# Altium PCB PCB_dustshield_final_2026-06-11.pcbdoc
Units mil, origin at the board's own origin, x right, y up, seen from the top; angles counter-clockwise.
Board outline 5255 x 3565 mil, 2 copper layers (Top Layer, Bottom Layer); 23 components, 38 nets, 114 pads, 6 vias.
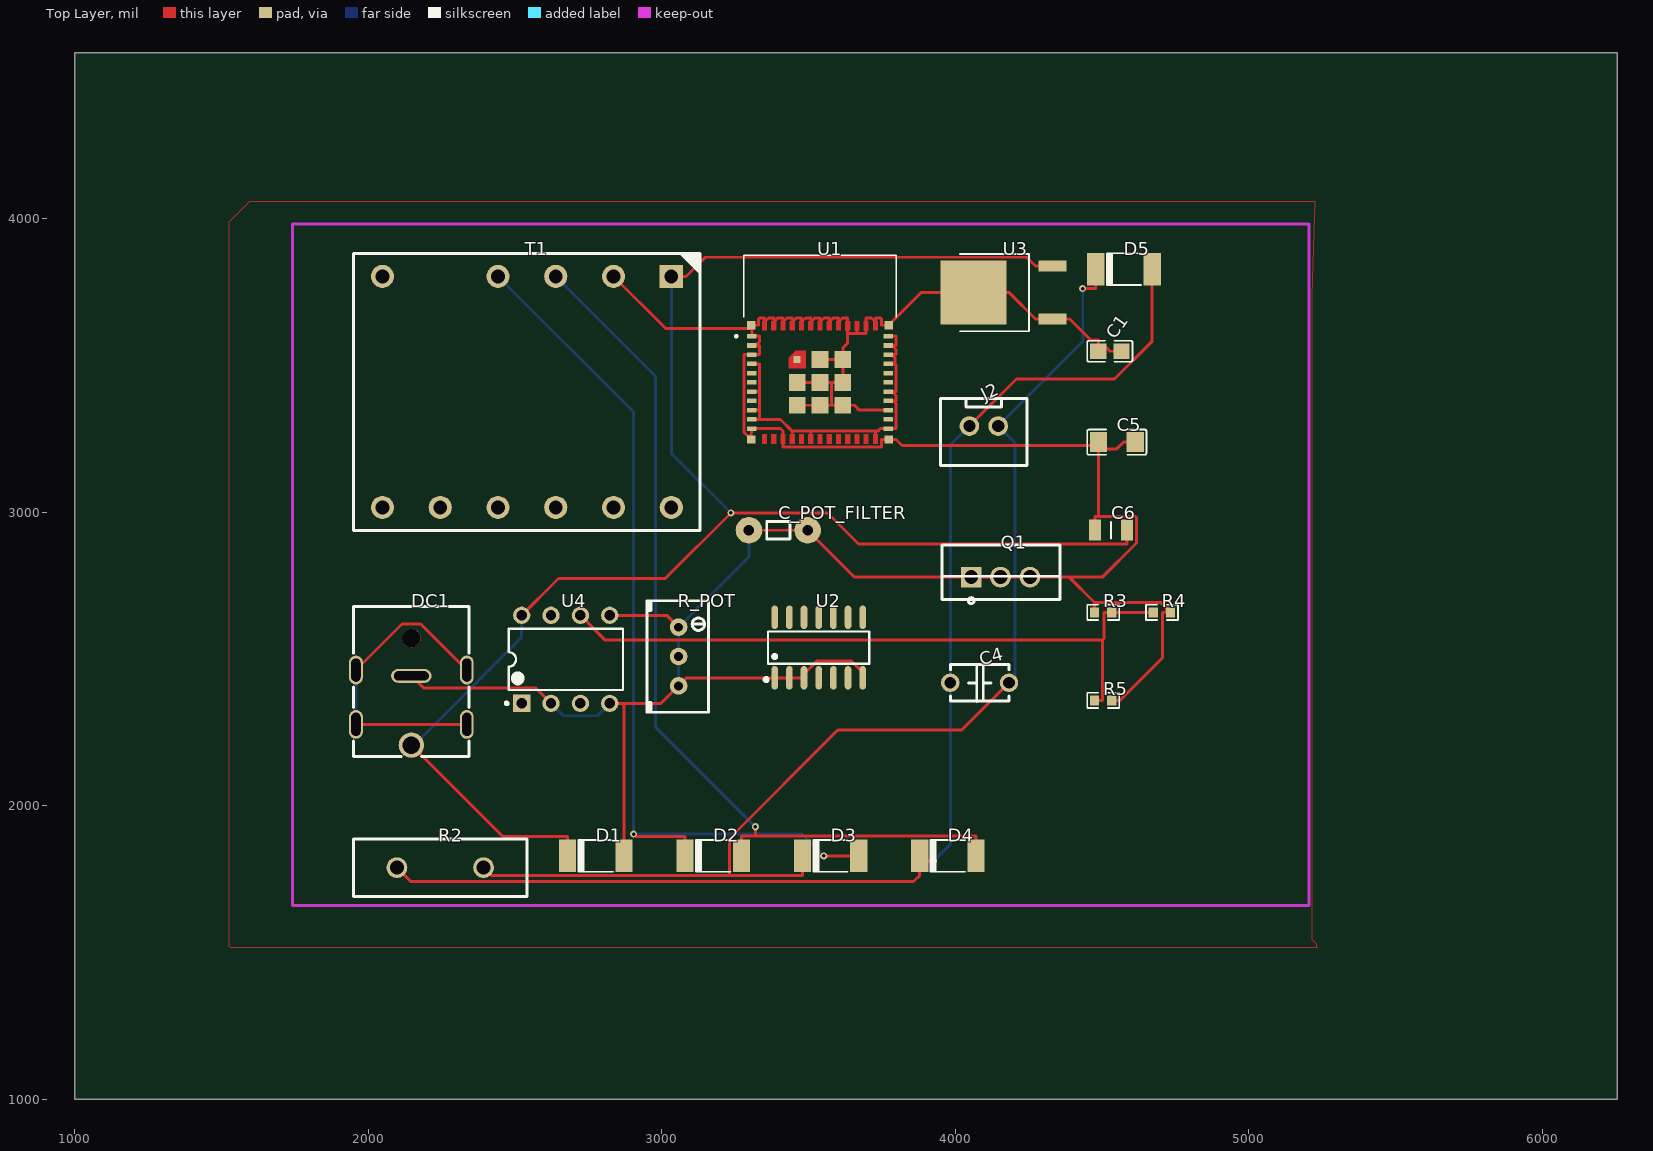
[diagram p0: Top Layer view]
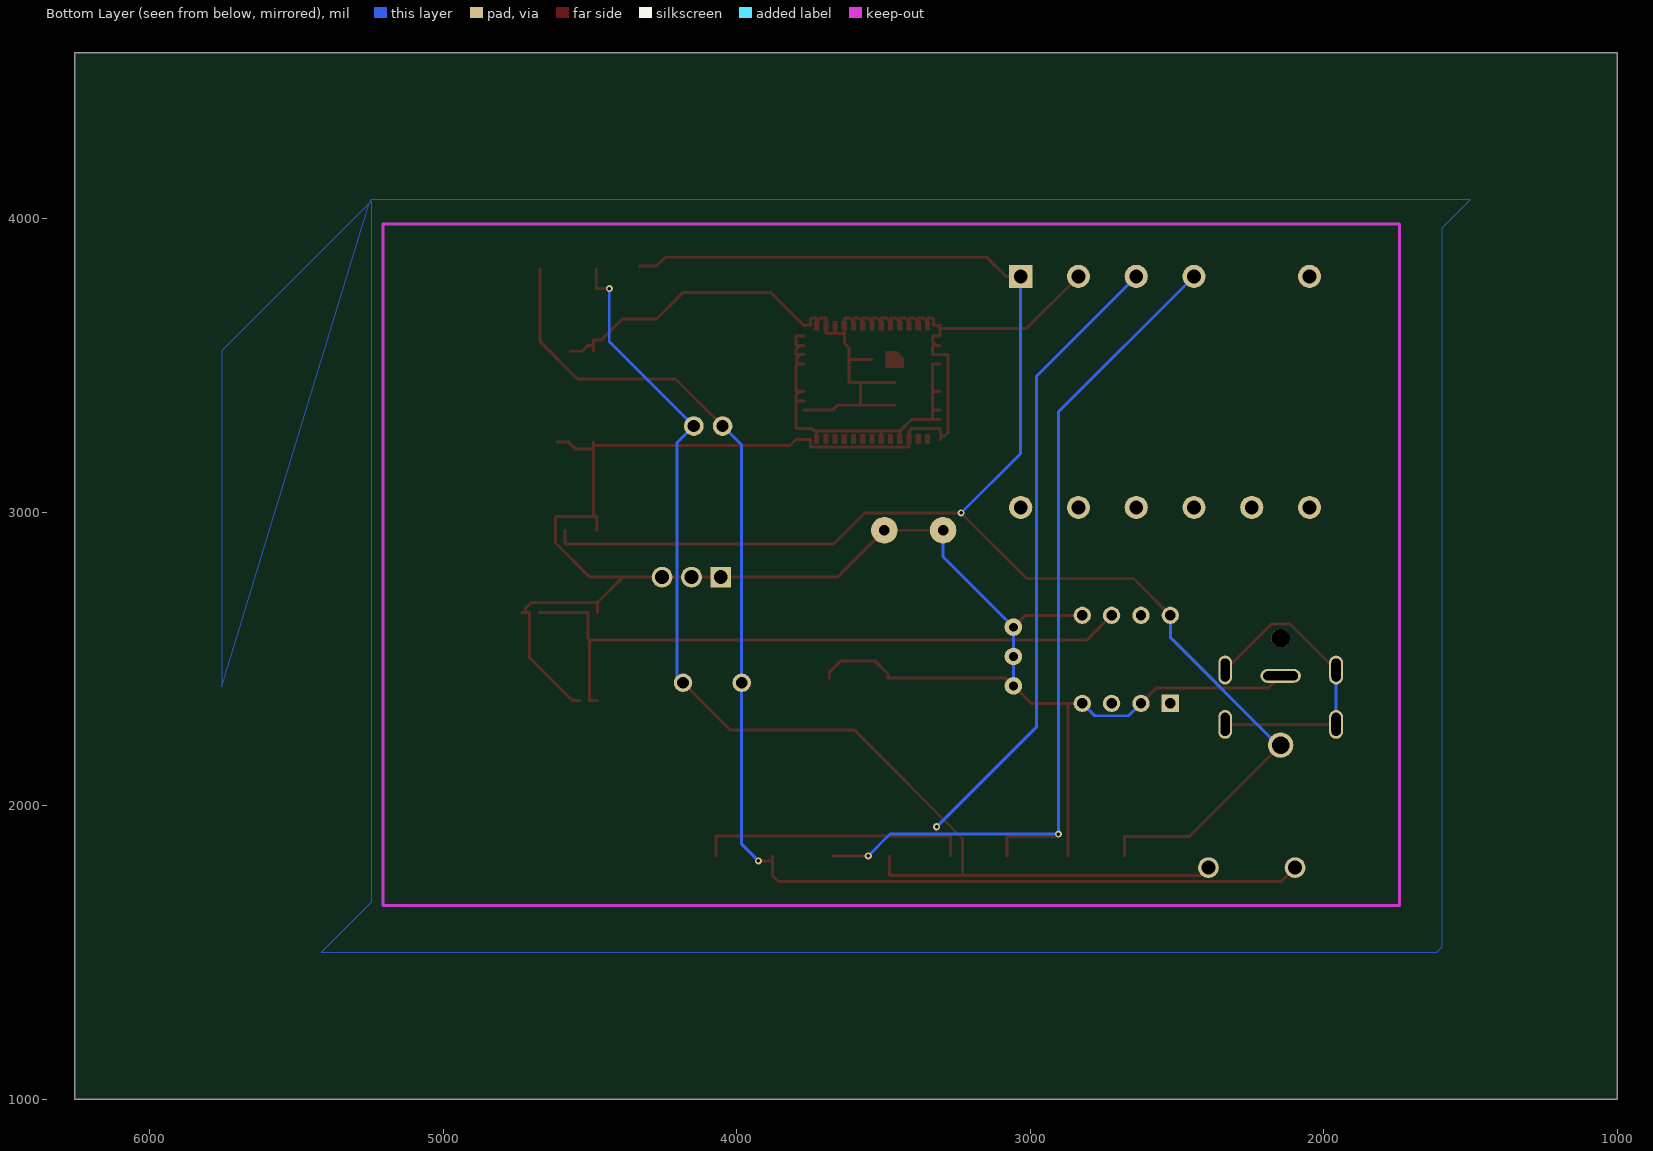
[diagram p1: Bottom Layer view, seen from below]

## Layer stack, top to bottom
Top Layer: signal copper (thickness not stored)
Dielectric: dielectric 12.6, FR-4, Dk 4.8
Bottom Layer: signal copper (thickness not stored)

## Board outline
6255,1000 1000,1000 1000,4565 6255,4565

## Components (designator, comment, footprint, x,y, rotation, side; value= is the part's Value field where it differs from the comment)
C1 "10uF" C0805 4526.75,3548.67 r0 top
C4 "100nF" CAP-TH_L5.1-W3.2-P5.08-D0.50 4082.91,2418.67 r0 top
C5 "10uF" C1206 4550.38,3238.67 r0 top
C6 "10uF" CAPC3216X180N 4530.75,2938.67 r0 top
C_POT_FILTER "C100nf" C100NF 3396.72,2938.67 r0 top
D1 "SUF4007" DO-213AB_L5.0-W2.5-RD 2774.84,1828.67 r0 top
D2 "SUF4007" DO-213AB_L5.0-W2.5-RD 3174.84,1828.67 r0 top
D3 "SUF4007" DO-213AB_L5.0-W2.5-RD 3574.84,1828.67 r0 top
D4 "SUF4007" DO-213AB_L5.0-W2.5-RD 3974.84,1828.67 r0 top
D5 "SUF4007" DO-213AB_L5.0-W2.5-RD 4574.84,3828.67 r0 top
DC1 "DC POWER JACK BORE 2.5MM L 13MM" DC-IN-TH_L13.0-W10.0-332114NA0 2146.3,2334.18 r0 top
J2 "ITO_HV" CONN-TH_2P-P2.50-XH2.54-2P 4097.09,3293.67 r0 top
Q1 "IRF740PBF_C34373758" TO-220AB-3_L10.0-W4.5-P2.54-L 4154.17,2778.67 r0 top
R2 "10MΩ" RES-TH_L15.0-W5.0-P7.50-D0.8 2244.72,1788.67 r0 top
R3 "10kΩ" R0603 4503.98,2658.67 r0 top
R4 "10Ω" R0603 4703.98,2658.67 r0 top
R5 "10Ω" R0603 4503.98,2358.67 r0 top
R_POT "10kΩ" RES-ADJ-TH_3296W 3057.08,2508.27 r0 top
T1 "Flyback Transformer" XFMR-TH_EE30-35W 2540,3410 r0 top
U1 "ESP32-C3-MINI-1-N4" XCVR_ESP32-C3-MINI-1-N4 3538.82,3548.67 r0 top
U2 "SN74HCT125DR-JSM" SOIC-14_L8.7-W3.9-P1.27-LS6.0-BL 3534.47,2538.67 r0 top
U3 "LM1117-3.3" TO-252-2_L6.6-W6.1-P4.58-LS9.7-BR-1 4196.66,3748.67 r0 top
U4 "TC4420CPA" DIP-8_L9.8-W6.6-P2.54-LS7.6-BL 2672.28,2498.67 r0 top

## Footprints (in the part's own frame and the unit in brackets; to place one, negate y for a bottom-side part, rotate by r counter-clockwise, add the part's x,y. Pads: shape width x height; smd on the part's side, far side on the other; paste and mask are expansions set on the pad)
C100NF [mm]
  round 2.3 hole 0.9 paste+0 mask+0.051: 1(-2.54,0) 2(2.54,0)
  silkscreen extent -1,-0.75 1,0.75
C0805 [mm]
  rect 1.41x1.35 smd paste-100 mask+0.051: 1(-1,0) 2(1,0)
  silkscreen extent -1.96,-0.9 1.96,0.9
C1206 [mm]
  rect 1.485x1.728 smd paste-100 mask+0.051: 1(-1.593,0) 2(1.593,0)
  silkscreen extent -2.56,-1.09 2.56,1.09
CAP-TH_L5.1-W3.2-P5.08-D0.50 [mm]
  round 1.6 hole 1 paste+0 mask+0.05: 1(-2.54,0) 2(2.54,0)
  silkscreen extent -2.54,-1.6 2.54,1.59
CAPC3216X180N [mil]
  rect 41.34x71.65 smd paste+0 mask+2: 1(-54.72,0) 2(54.72,0)
  silkscreen extent 0,-28 0,28
CONN-TH_2P-P2.50-XH2.54-2P [mm]
  round 1.7 hole 1.05 paste+0 mask+0.05: 1(1.25,0) 2(-1.25,0)
  silkscreen extent -3.75,-3.42 3.75,2.37
DC-IN-TH_L13.0-W10.0-332114NA0 [mm]
  round 2.2 hole 1.5 paste+0 mask+0.051: 1(0,-3.25)
  oval 3.5x1.2 hole 0.8 slot 3 at 0 deg paste+0 mask+0.051: 2(0,2.75)
  oval 1.2x2.5 hole 0.8 slot 2 at 90 deg paste+0 mask+0.051: 3(-4.8,-1.45) 3(-4.8,3.25) 3(4.8,-1.45) 3(4.8,3.25)
  round 1.6 hole 1.6 unplated paste+0: ""(0,6)
  silkscreen extent -5,-4.25 5,8.75
DIP-8_L9.8-W6.6-P2.54-LS7.6-BL [mm]
  rect 1.5x1.5 hole 0.9 paste+0 mask+0.051: 1(-3.81,-3.81)
  round 1.5 hole 0.9 paste+0 mask+0.051: 2(-1.27,-3.81) 3(1.27,-3.81) 4(3.81,-3.81) 5(3.81,3.81) 6(1.27,3.81) 7(-1.27,3.81) 8(-3.81,3.81)
  silkscreen extent -5.23,-3.93 4.96,2.65
DO-213AB_L5.0-W2.5-RD [mm]
  rect 1.485x2.808 smd paste+0 mask+0.051: 1(-2.442,0) 2(2.442,0)
  silkscreen extent -1.5,-1.38 1.5,1.38
R0603 [mil]
  rect 31.75x34.02 smd paste-3937.01 mask+2: 1(-29.65,0) 2(29.65,0)
  silkscreen extent -55,-26 55,26
RES-ADJ-TH_3296W [mil]
  round 60 hole 30 paste+0 mask+2: 1(0,100.01) 2(0,0.01) 3(0,-99.99)
  silkscreen extent -108,-190 102,190
RES-TH_L15.0-W5.0-P7.50-D0.8 [mm]
  round 1.8 hole 1.2 paste+0 mask+0.05: 1(-3.75,0) 2(3.75,0)
  silkscreen extent -7.5,-2.5 7.5,2.5
SOIC-14_L8.7-W3.9-P1.27-LS6.0-BL [mil]
  oval 22.6x80.24 smd paste+0 mask+2: 1(-150,-103.1) 2(-100,-103.1) 3(-50,-103.1) 4(0,-103.1) 5(50,-103.1) 6(100,-103.1) 7(150,-103.1) 8(150,103.11) 9(100,103.11) 10(50,103.11) 11(0,103.11) 12(-50,103.11) 13(-100,103.11) 14(-150,103.11)
  silkscreen extent -185,-115 172,55
TO-220AB-3_L10.0-W4.5-P2.54-L [mm]
  rect 1.8x1.8 hole 1.2 paste+0 mask+0.051: 1(-2.54,0)
  round 1.8 hole 1.2 paste+0 mask+0.051: 2(0,0) 3(2.54,0)
  silkscreen extent -5.08,-2.29 5.15,2.79
TO-252-2_L6.6-W6.1-P4.58-LS9.7-BR-1 [mm]
  rect 2.409x0.979 smd paste+0 mask+0.051: 1(3.424,-2.29) 3(3.423,2.29)
  rect 5.711x5.548 smd paste+0 mask+0.051: 2(-3.424,0)
  silkscreen extent -4.58,-3.35 1.38,3.35
XCVR_ESP32-C3-MINI-1-N4 [mil]
  rect 31.5x15.75 smd paste+0 mask+2: 1(-232.28,51.18) 2(-232.28,19.69) 3(-232.28,-11.81) 4(-232.28,-43.31) 5(-232.28,-74.8) 6(-232.28,-106.3) 7(-232.28,-137.79) 8(-232.28,-169.29) 9(-232.28,-200.79) 10(-232.28,-232.28) 11(-232.28,-263.78) 25(232.28,-263.78) 26(232.28,-232.28) 27(232.28,-200.79) 28(232.28,-169.29) 29(232.28,-137.79) 30(232.28,-106.3) 31(232.28,-74.8) 32(232.28,-43.31) 33(232.28,-11.81) 34(232.28,19.69) 35(232.28,51.18)
  rect 23.62x23.62 smd paste+0 mask+2: 49_1(-77.76,-28.54)
  rect 57.09x57.09 smd paste+0 mask+2: 49_2(0,-28.54) 49_3(77.76,-28.54) 49_4(77.76,-106.3) 49_5(77.76,-184.05) 49_6(0,-184.05) 49_7(-77.76,-184.05) 49_8(-77.76,-106.3) 49_9(0,-106.3)
  rect 27.56x27.56 smd paste+0 mask+2: 50(234.25,88.58) 51(234.25,-301.18) 52(-234.25,-301.18) 53(-234.25,88.58)
  Top Layer region: -106.3,-57.09 -49.21,-57.09 -49.21,0 -82.68,0 -106.3,-23.62
  Top Layer region: -196.85,-283.46 -181.1,-283.46 -181.1,-314.96 -196.85,-314.96
  Top Layer region: -165.35,-283.46 -149.61,-283.46 -149.61,-314.96 -165.35,-314.96
  Top Layer region: -133.86,-283.46 -118.11,-283.46 -118.11,-314.96 -133.86,-314.96
  Top Layer region: -102.36,-283.46 -86.61,-283.46 -86.61,-314.96 -102.36,-314.96
  Top Layer region: -70.87,-283.46 -55.12,-283.46 -55.12,-314.96 -70.87,-314.96
  Top Layer region: -39.37,-283.46 -23.62,-283.46 -23.62,-314.96 -39.37,-314.96
  Top Layer region: -7.87,-283.46 7.87,-283.46 7.87,-314.96 -7.87,-314.96
  Top Layer region: 23.62,-283.46 39.37,-283.46 39.37,-314.96 23.62,-314.96
  Top Layer region: 55.12,-283.46 70.87,-283.46 70.87,-314.96 55.12,-314.96
  Top Layer region: 86.61,-283.46 102.36,-283.46 102.36,-314.96 86.61,-314.96
  Top Layer region: 118.11,-283.46 133.86,-283.46 133.86,-314.96 118.11,-314.96
  Top Layer region: 149.61,-283.46 165.35,-283.46 165.35,-314.96 149.61,-314.96
  Top Layer region: 181.1,-283.46 196.85,-283.46 196.85,-314.96 181.1,-314.96
  Top Layer region: 181.1,102.36 196.85,102.36 196.85,70.87 181.1,70.87
  Top Layer region: 149.61,102.36 165.35,102.36 165.35,70.87 149.61,70.87
  Top Layer region: 118.11,102.36 133.86,102.36 133.86,70.87 118.11,70.87
  Top Layer region: 86.61,102.36 102.36,102.36 102.36,70.87 86.61,70.87
  Top Layer region: 55.12,102.36 70.87,102.36 70.87,70.87 55.12,70.87
  Top Layer region: 23.62,102.36 39.37,102.36 39.37,70.87 23.62,70.87
  Top Layer region: -7.87,102.36 7.87,102.36 7.87,70.87 -7.87,70.87
  Top Layer region: -39.37,102.36 -23.62,102.36 -23.62,70.87 -39.37,70.87
  Top Layer region: -70.87,102.36 -55.12,102.36 -55.12,70.87 -70.87,70.87
  Top Layer region: -102.36,102.36 -86.61,102.36 -86.61,70.87 -102.36,70.87
  Top Layer region: -133.86,102.36 -118.11,102.36 -118.11,70.87 -133.86,70.87
  Top Layer region: -165.35,102.36 -149.61,102.36 -149.61,70.87 -165.35,70.87
  Top Layer region: -196.85,102.36 -181.1,102.36 -181.1,70.87 -196.85,70.87
  Top Layer lines w0.39: -106.3,-57.09 -49.21,-57.09 -49.21,0 -82.68,0 -106.3,-23.62 -106.3,-57.09
  silkscreen extent -289,47 260,327
XFMR-TH_EE30-35W [mm]
  rect 2x2 hole 1.2 paste+0 mask+0.051: 1(12.501,10.001)
  round 2 hole 1.2 paste+0 mask+0.051: 2(7.499,9.999) 3(2.501,9.999) 4(-2.501,9.999) 6(-12.501,9.999) 7(12.501,-10) 8(7.499,-10) 9(2.501,-10) 10(-2.501,-10) 11(-7.499,-10) 12(-12.501,-10)
  silkscreen extent -15,-12 15,12

## Via types
v1: diameter 24, hole 12, Top Layer to Bottom Layer, tented both sides, 6 vias

## Nets (pads, with @x,y where several pads share a name; then routed paths per layer and width w, separated by ;. In a path a pad name is that pad's centre, name@x,y a point inside that pad or via, vN(x,y) a via of type N, cw(c..) or ccw(c..) an arc to the next point about the centre after c; other vN are vias at no path point)
5V: U2.14
+12V: C6.2 D1.1 DC1.1 T1.1 U3.3 U4.8 | length 5858.2
  Top Layer w10: DC1.1 2457.57,1894.96 2678.68,1894.96 D1.1 ; U4.8 2647.8,2774.19 3011.88,2774.19 v1(3235.19,2997.5) 3564.06,2997.5 3669.77,2891.79 4585.42,2891.79 4585.47,2891.84 C6.2 ; T1.1@3032.15,3803.72 3082.53,3803.72 3147.76,3868.95 4242.89,3868.95 4273.01,3838.83 U3.3
  Bottom Layer w10: DC1.1 2154.9,2206.24 2522.28,2573.62 U4.8 ; T1.1@3032.15,3803.72 3032.15,3200.54 v1(3235.19,2997.5)
D4_1: C4.1 D4.1 D5.2 J2.2 R2.1 | length 4444.6
  Top Layer w10: R2.1 2144.22,1741.54 3857.84,1741.54 3878.68,1762.38 3878.68,1795.53 D4.1@3878.68,1812.1 ; D4.1 D4.1@3878.68,1812.1 ; v1(3926.25,1812.1) D4.1@3878.68,1812.1 ; J2.2 4208.42,3454.22 4542.91,3454.22 4671,3582.31 D5.2
  Bottom Layer w10: v1(3926.25,1812.1) 3982.91,1868.76 C4.1 3982.91,3228.71 J2.2
DC1_3: DC1.3 | length 1071.2
  Top Layer w10: DC1.3@1957.32,2277.1 DC1.3@2335.28,2277.1 ; DC1.3@1957.32,2462.13 2114.58,2619.39 2178.02,2619.39 DC1.3@2335.28,2462.13
  Bottom Layer w10: DC1.3@1957.32,2277.1 DC1.3@1957.32,2462.13
GND: C1.1 C1.2 C5.1 C5.2 C6.1 C_POT_FILTER.1 C_POT_FILTER.2 D1.2 DC1.2 Q1.1 Q1.2 Q1.3 R3.1 R4.2 R5.2 R_POT.1 R_POT.2 R_POT.3 T1.2 U1.1 U1.2 U1.3 U1.11 U1.27 U1.49_1 U1.49_2 U1.49_3 U1.49_4 U1.49_5 U1.49_6 U1.49_7 U1.49_8 U1.49_9 U1.50 U1.51 U1.52 U1.53 U2.1 U2.2 U2.3 U2.7 U3.1 U3.2 U4.2 U4.4 U4.5 | length 11145.8
  Top Layer w10: DC1.2 2188.15,2400.6 2570.35,2400.6 U4.2 ; U4.4 2871,2348.67 ; U4.5 3016.69,2648.67 R_POT.1 ; T1.2@2835.25,3803.67 3012.1,3626.82 U1.53@3306.55,3626.82 ; D1.2 2871,1894.96 2871,2348.67 ; C_POT_FILTER.1 C_POT_FILTER.2 3656.72,2778.67 Q1.1 Q1.2 Q1.3 4388.23,2778.67 ; U1.52 U1.52@3304.58,3259.89 ; U1.53 U1.53@3316.98,3637.25 ; U1.2@3306.55,3568.36 U1.2@3319.93,3568.36 ; 3349.85,3635.28 3349.85,3648.66 ; 3381.35,3635.28 3381.35,3648.66 ; 3412.85,3635.28 3412.85,3648.66 ; 3444.34,3635.28 3444.34,3648.66 ; U1.49_7 U1.49_6 3577.71,3364.62 ; U1.49_8 U1.49_9 3577.71,3442.37 ; 3475.84,3635.28 3475.84,3648.66 ; 3507.33,3635.28 3507.33,3648.66 ; U1.49_2 U1.49_3 ; 3538.83,3635.28 3538.83,3648.66 ; 3570.33,3635.28 3570.33,3648.66 ; 3601.82,3635.28 3601.82,3648.66 ; 3664.81,3635.28 3664.81,3608.53 ; U2.7 3684.47,2454.44 3646.42,2492.49 3527.82,2492.49 3484.47,2449.14 U2.3 U2.2 U2.1 3084.38,2435.56 R_POT.3 2997.49,2348.67 2871,2348.67 ; 3727.81,3635.28 3727.81,3648.66 ; U1.27 3672.88,3347.88 3656.14,3364.62 U1.49_5 3577.71,3364.62 ; U1.50 U1.50@3772.46,3637.25 ; R3.1 4474.32,2692.58 ; C6.1 4476.03,2985.51 4487.63,2985.51 4487.68,2985.56 ; C1.1 C1.1@4487.38,3567.47 ; C5.1 C5.1@4487.68,3227.42 ; R5.2 4560.52,2358.67 4706.75,2504.9 4706.75,2658.67 R4.2@4720.19,2658.67 ; C1.2 4527.36,3548.67 4508.56,3567.47 C1.1@4487.38,3567.47 ; C5.2 4572.83,3238.67 4550.32,3216.16 C5.1@4487.68,3216.16 ; R4.2 R4.2@4720.19,2658.67 ; U1.52@3304.58,3259.89 3304.58,3272.28 3306.55,3274.25 3306.55,3284.89 3333.31,3284.89 3404.18,3284.89 3412.85,3276.22 3412.85,3258.86 3412.85,3249.46 3412.85,3222.7 3412.9,3222.65 3748.24,3222.65 3748.29,3222.7 3748.29,3247.49 U1.51 3797.87,3247.49 3817.94,3227.42 C5.1@4487.68,3227.42 ; U1.52@3304.58,3259.89 3292.15,3259.89 3279.74,3272.3 3279.74,3536.81 3279.79,3536.86 3306.55,3536.86 3333.31,3536.86 3333.31,3568.36 U1.2@3319.93,3568.36 ; U1.53@3306.55,3626.82 U1.53@3316.98,3637.25 ; U1.53@3306.55,3626.82 3306.55,3599.85 3333.31,3599.85 3333.31,3581.74 U1.2@3319.93,3568.36 ; U1.53@3316.98,3637.25 3329.37,3637.25 3329.37,3659.13 3332.28,3662.04 3349.85,3662.04 3349.85,3648.66 ; 3349.85,3648.66 3363.23,3662.04 3381.35,3662.04 3381.35,3648.66 ; 3381.35,3648.66 3394.73,3662.04 3412.85,3662.04 3412.85,3648.66 ; 3412.85,3648.66 3426.23,3662.04 3444.34,3662.04 3444.34,3648.66 ; 3444.34,3648.66 3457.72,3662.04 3475.84,3662.04 3475.84,3648.66 ; 3475.84,3648.66 3489.22,3662.04 3507.33,3662.04 3507.33,3648.66 ; 3507.33,3648.66 3520.71,3662.04 3538.83,3662.04 3538.83,3648.66 ; 3538.83,3648.66 3552.21,3662.04 3570.33,3662.04 3570.33,3648.66 ; 3570.33,3648.66 3583.71,3662.04 3601.82,3662.04 3601.82,3648.66 ; 3577.71,3364.62 3577.71,3442.37 ; 3577.71,3442.37 U1.49_4 U1.49_3 ; 3601.82,3648.66 3615.2,3662.04 3633.32,3662.04 3633.32,3635.28 3633.32,3608.53 ; U1.49_3 3616.59,3559.69 3633.32,3576.42 3633.32,3608.53 ; 3633.32,3608.53 3664.81,3608.53 ; 3664.81,3608.53 3696.31,3608.53 3696.31,3635.28 3696.31,3662.04 3714.43,3662.04 3727.81,3648.66 ; 3727.81,3648.66 3727.81,3662.04 3745.38,3662.04 3748.29,3659.13 3748.29,3637.25 U1.50@3772.46,3637.25 ; U1.50@3772.46,3637.25 3883.88,3748.67 U3.2 4185.3,3748.67 4185.3,3746.23 4273.02,3658.51 4306.22,3658.51 U3.1 4389.89,3658.51 4462.14,3586.26 4487.38,3586.26 C1.1@4487.38,3567.47 ; 4388.23,2778.67 4474.32,2692.58 ; 4388.23,2778.67 4501.15,2778.67 4617.2,2894.72 4617.2,2982.65 4614.29,2985.56 4487.68,2985.56 ; 4474.32,2692.58 4700.32,2692.58 4720.19,2672.71 R4.2@4720.19,2658.67 ; 4487.68,2985.56 4487.68,3193.64 C5.1@4487.68,3216.16 ; C5.1@4487.68,3216.16 C5.1@4487.68,3227.42
  Bottom Layer w10: U4.2 2664.53,2306.42 2780.03,2306.42 U4.4 ; R_POT.3 R_POT.2 R_POT.1 3296.72,2847.9 C_POT_FILTER.1
IO18: U1.26
ITO_HV: C4.2 D3.1 D5.1 J2.1 R2.2 | length 4068.4
  Top Layer w10: R2.2 2418.71,1762.33 3230.32,1762.33 ; D3.1 3478.68,1795.53 3478.68,1762.38 3478.63,1762.33 3230.32,1762.33 ; C4.2 4022.21,2257.97 3599.76,2257.97 3230.32,1888.53 3230.32,1762.33 ; v1(4434.22,3762.38) 4478.68,3762.38 D5.1
  Bottom Layer w10: C4.2 4204.17,2439.93 4204.17,3235.8 J2.1 4434.22,3581.59 v1(4434.22,3762.38)
S$133: 
T1_3: D2.2 D4.2 T1.3 | length 3122.8
  Top Layer w10: D2.2 3271,1894.96 3272.01,1895.97 3318.54,1895.97 ; v1(3318.54,1928.17) 3318.54,1895.97 ; D4.2 4071,1894.96 4069.99,1895.97 3318.54,1895.97
  Bottom Layer w10: T1.3@2638.45,3803.67 2977.71,3464.41 2977.71,2269 v1(3318.54,1928.17)
T1_4: D2.1 D3.2 T1.4 | length 3134.3
  Top Layer w10: v1(2903.97,1903.25) 2912.26,1894.96 3078.68,1894.96 D2.1 ; v1(3551.69,1828.67) D3.2
  Bottom Layer w10: T1.4@2441.55,3803.67 2903.97,3341.25 v1(2903.97,1903.25) 3477.11,1903.25 v1(3551.69,1828.67)
U1_4: U1.4 U1.7 U1.9 U1.10 U1.25 U1.28 U1.29 U1.32 U1.33 U1.34 U1.35 | length 1353.2
  Top Layer w10: U1.10@3306.55,3316.39 3333.31,3316.39 ; U1.9@3306.55,3347.88 3333.31,3347.88 ; U1.7@3306.55,3410.88 3333.31,3410.88 ; U1.4@3306.55,3505.36 3333.31,3505.36 3333.36,3505.31 3333.36,3410.93 3333.31,3410.88 ; 3444.34,3249.46 3444.34,3276.22 ; 3507.33,3249.46 3507.33,3276.22 3507.33,3276.27 ; 3727.81,3249.46 3727.81,3272.24 3727.81,3276.22 ; U1.28 3787.81,3379.38 3789.09,3379.38 ; U1.29 U1.29@3784.49,3410.88 ; U1.32 3793.89,3505.36 ; U1.33 U1.33@3784.49,3536.86 ; U1.34 U1.34@3784.49,3568.36 ; U1.35 3797.87,3599.85 3797.87,3568.36 U1.34@3784.49,3568.36 ; 3333.31,3316.39 3333.31,3347.88 ; 3333.31,3316.39 3404.17,3316.39 3444.34,3276.22 ; 3333.31,3347.88 3333.36,3347.93 3333.36,3410.83 3333.31,3410.88 ; 3444.34,3276.22 3444.39,3276.27 3507.33,3276.27 ; 3507.33,3276.27 3727.76,3276.27 3727.81,3276.22 ; 3727.81,3276.22 3735.68,3276.22 3744.35,3284.89 U1.25 3784.49,3284.89 3797.87,3284.89 3797.95,3284.97 3797.95,3370.52 3789.09,3379.38 ; U1.29@3784.49,3410.88 3797.87,3410.88 3797.92,3410.93 3797.92,3501.33 3793.89,3505.36 ; U1.29@3784.49,3410.88 3797.87,3397.5 3797.87,3379.38 3789.09,3379.38 ; U1.33@3784.49,3536.86 3797.87,3536.86 3797.87,3554.98 U1.34@3784.49,3568.36 ; U1.33@3784.49,3536.86 3793.89,3527.46 3793.89,3505.36
U1_5: U1.5
U1_6: U1.6
U1_8: U1.8
U1_12: 
U1_13: 
U1_16: 
U1_18: 
U1_19: 
U1_20: 
U1_21: 
U1_22: 
U1_23: 
U1_30: U1.30
U1_31: U1.31
U2_4: U2.4
U2_5: U2.5
U2_6: U2.6
U2_8: U2.8
U2_9: U2.9
U2_10: U2.10
U2_11: U2.11
U2_12: U2.12
U2_13: U2.13
U4_1: U4.1
U4_3: U4.3
U4_6: R3.2 R4.1 R5.1 U4.6 | length 2310.8
  Top Layer w10: U4.6 2807.03,2563.92 4501.21,2563.92 ; R5.1 4501.21,2358.67 4501.21,2563.92 ; R4.1 R3.2 4506.75,2658.67 4506.75,2569.46 4501.21,2563.92
U4_7: U4.7
pads on no net: DC1. T1.6 T1.7 T1.8 T1.9 T1.10 T1.11 T1.12

## Polygon pours and split planes (outlines as drawn)
GND on Bottom Layer (solid): 1615,1500 1595,1520 1595,3970 1500,4065 5245,4065 5250,4060 5252.2,4052.8 5755,3550 5755,2405 5252.2,4052.8 5245,4060 5245,1670 5415,1500 1615,1500
GND on Top Layer (solid): 1530,1515 1525,1520 1525,3990 1595,4060 5225,4060 5215,3740 5215,1545 5230,1530 5230,1520 5235,1515 1530,1515